# Altium PCB PCB2.PcbDoc
Units mm, origin at the board's own origin, x right, y up, seen from the top; angles counter-clockwise.
Board outline 40.13 x 50.55 mm, 2 copper layers (Top Layer, Bottom Layer); 19 components, 20 nets, 50 pads, 0 vias.
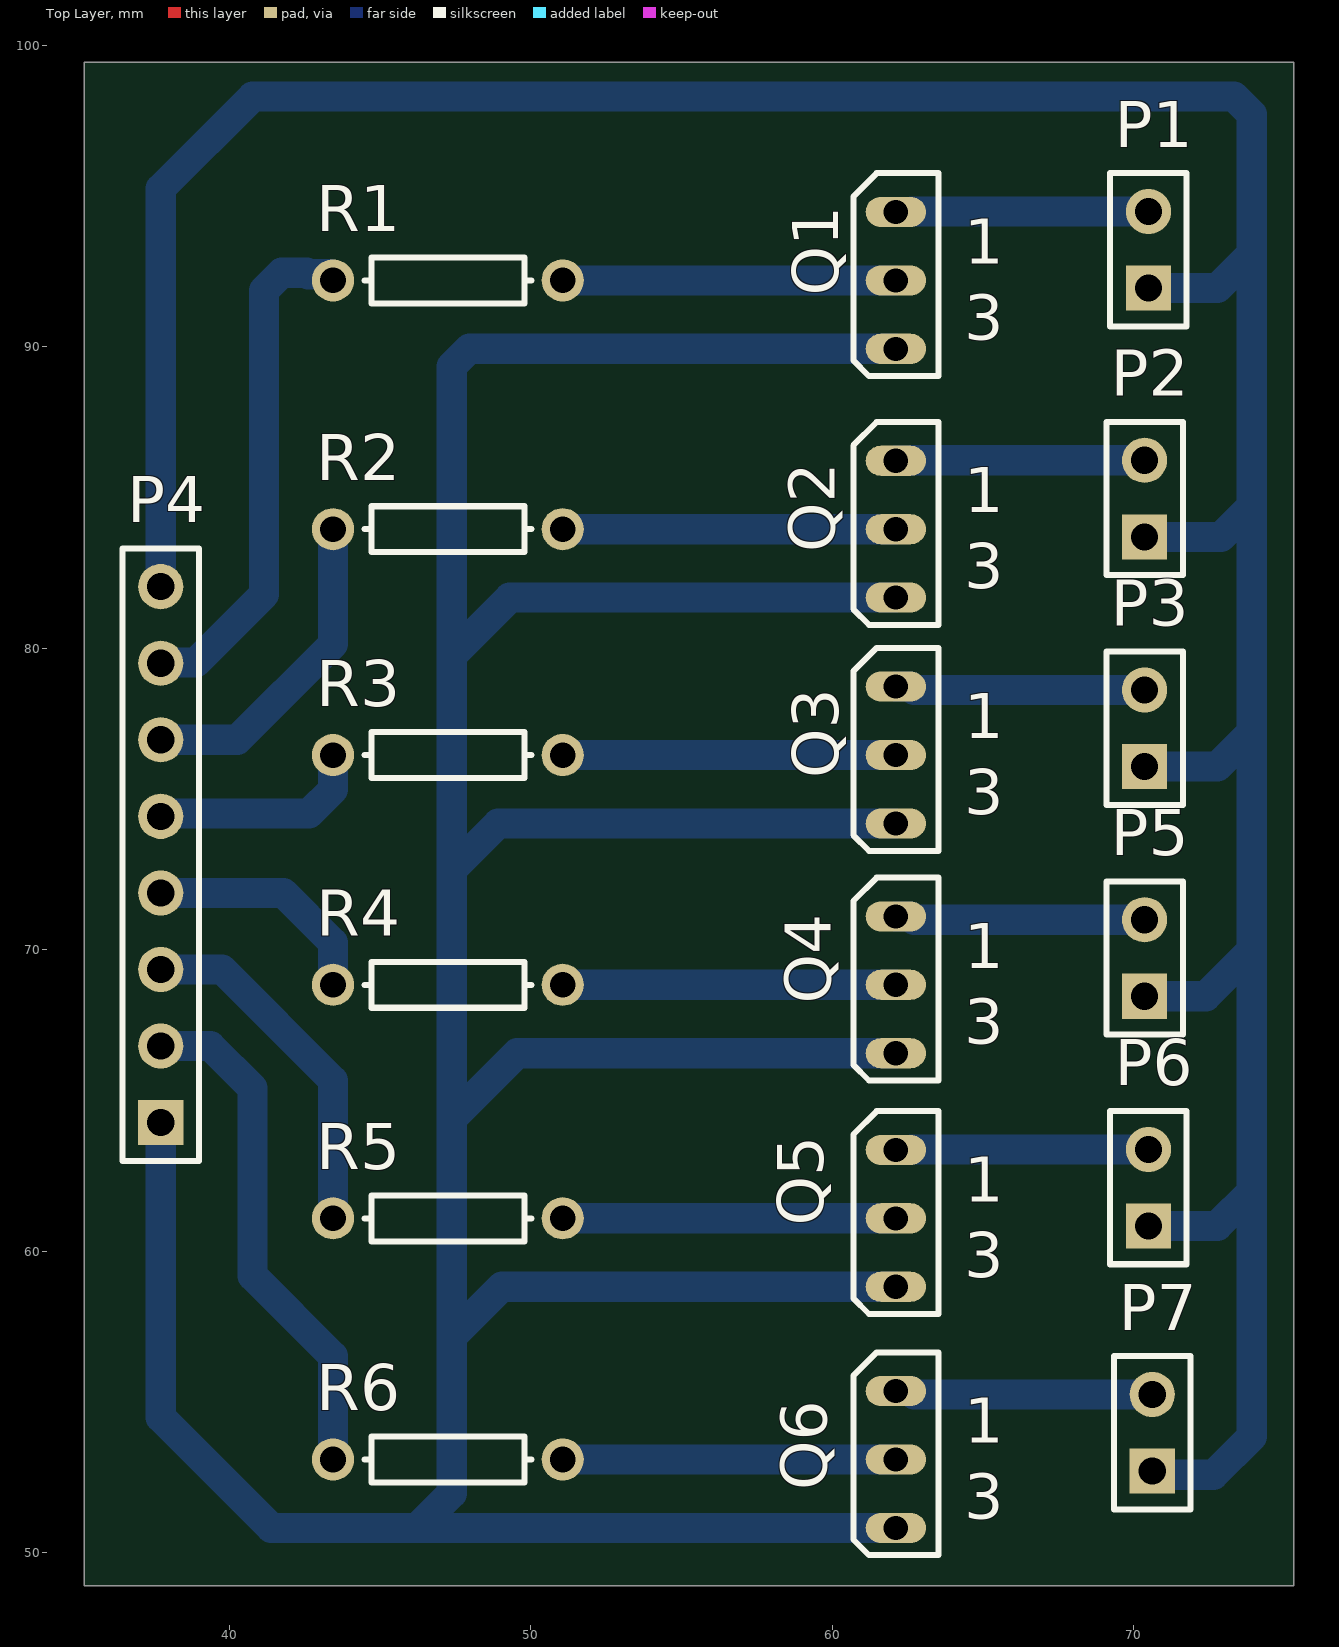
[diagram p0: Top Layer view]
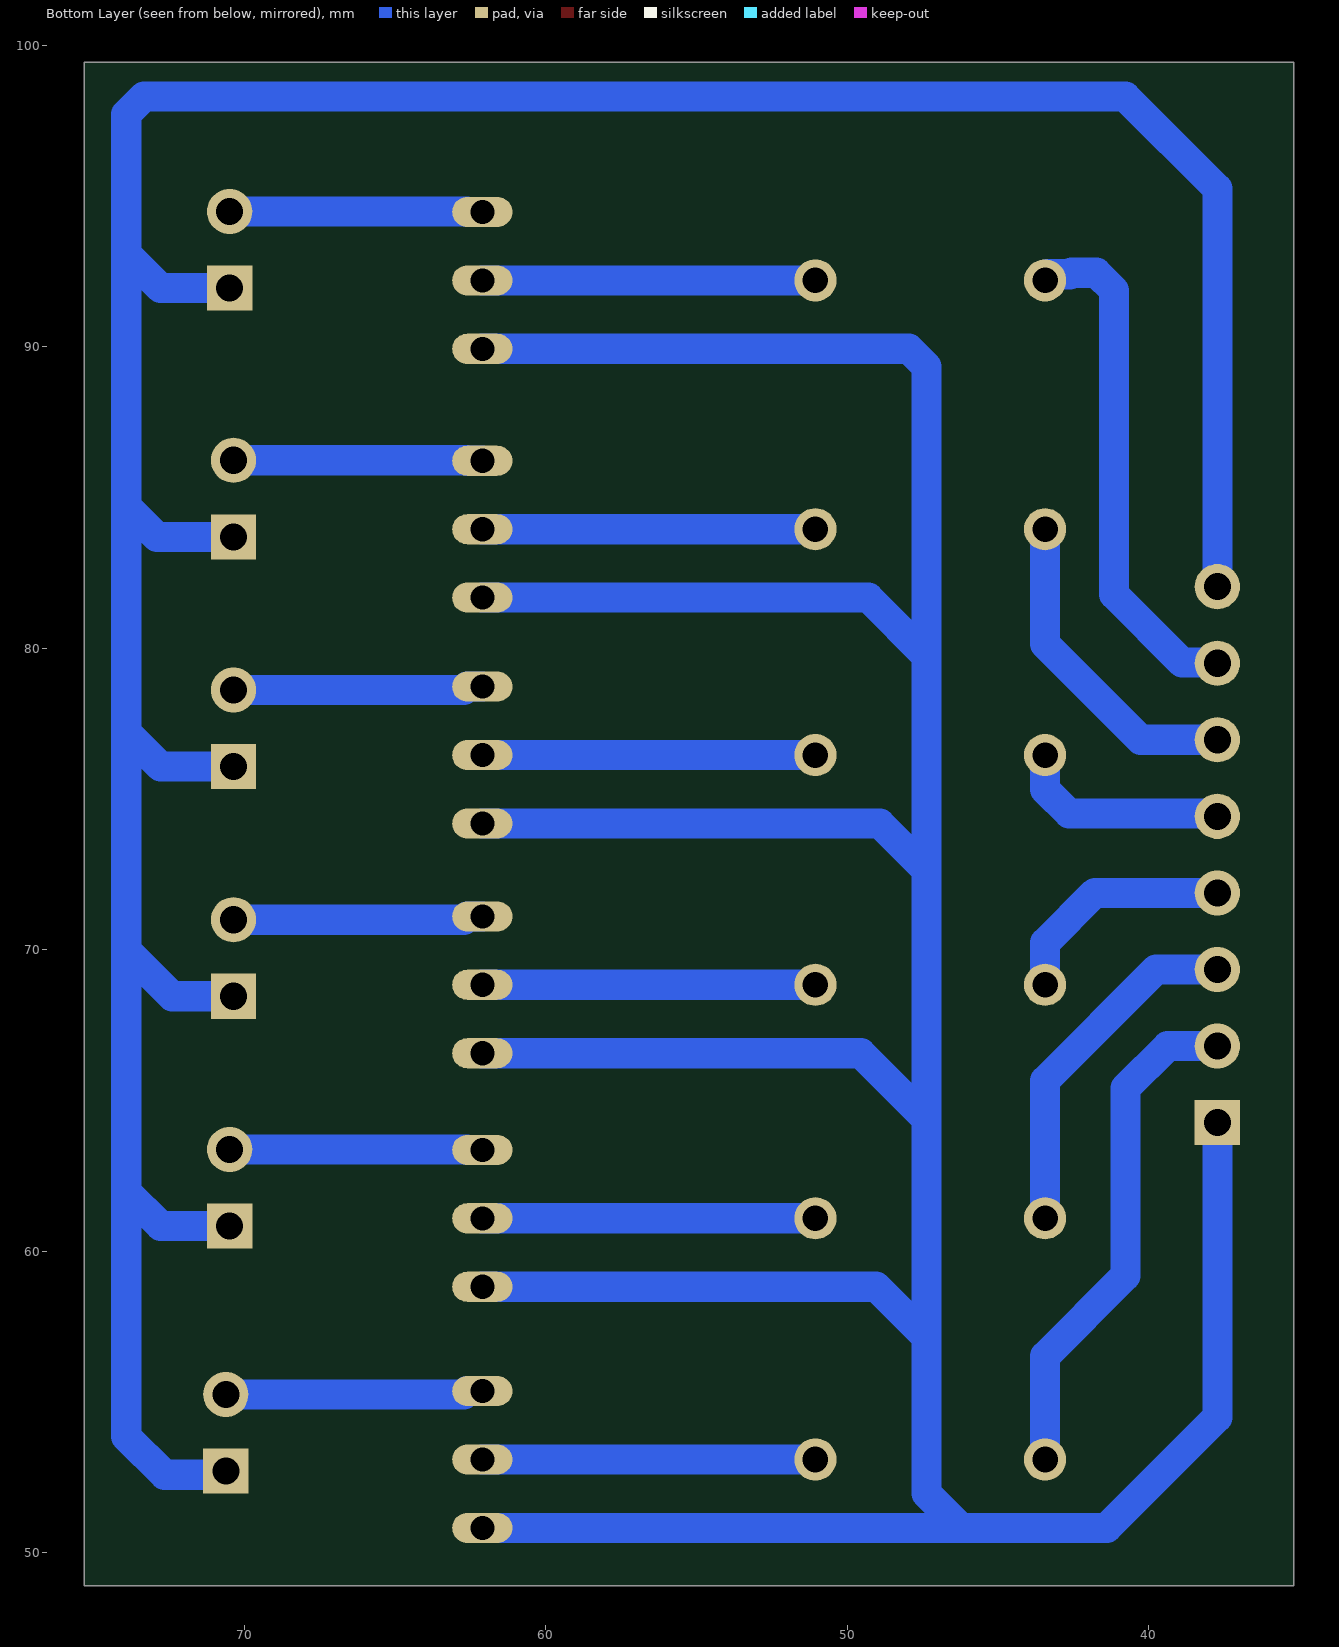
[diagram p1: Bottom Layer view, seen from below]

## Layer stack, top to bottom
Top Solder: solder mask 0.0102, Solder Resist, Dk 3.5
Top Layer: signal copper 0.0356
Dielectric 1: dielectric 0.32, FR-4, Dk 4.8
Bottom Layer: signal copper 0.0356
Bottom Solder: solder mask 0.0102, Solder Resist, Dk 3.5

## Board outline
35.179,48.895 35.179,99.441 75.311,99.441 75.311,48.895

## Design rules (kind name [scope] priority, off if disabled: settings)
Clearance [All] p1: gap=0.254 ignorepadtopadclearanceinfootprint=FALSE except(0: Arc-Hole Track-Hole SMDPad-Hole THPad-Hole Via-Hole Fill-Hole Poly-Hole Region-Hole Text-Hole)
PolygonConnect [All] p1: connectstyle=Relief reliefconductorwidth=0.254 reliefentries=4 polygonreliefangle="90 Angle" airgapwidth=0.254
RoutingVias [All] p1: holewidth=0.711 width=1.27 viastyle="Through Hole" minholewidth=0.711 minwidth=1.27 maxholewidth=0.711 maxwidth=1.27
SolderMaskExpansion [All] p1: expansion=0.102 istentingtop=FALSE
Width [All] p1: maxlimit=1.2 minlimit=1 preferedwidth=1
30 further rules are at their usual default settings.

## Classes and differential pairs
component class Sheet: P1 P2 P3 P4 P5 P6 P7 Q1 R1 R2 R3 R5 R6

## Components (designator, comment, footprint, x,y, rotation, side; value= is the part's Value field where it differs from the comment)
P1 "Header 2" HDR1X2 70.485,91.948 r90 top
P2 "Header 2" HDR1X2 70.358,83.693 r90 top
P3 "Header 2" HDR1X2 70.358,76.073 r90 top
P4 "Header 8" HDR1X8 37.719,64.262 r90 top
P5 "Header 2" HDR1X2 70.358,68.453 r90 top
P6 "Header 2" HDR1X2 70.485,60.833 r90 top
P7 "Header 2" HDR1X2 70.612,52.705 r90 top
Q1 "MOSFET-N" E3 62.103,92.202 r0 top
Q2 "MOSFET-N" E3 62.103,83.947 r0 top
Q3 "MOSFET-N" E3 62.103,76.454 r0 top
Q4 "MOSFET-N" E3 62.103,68.834 r0 top
Q5 "MOSFET-N" E3 62.103,61.087 r0 top
Q6 "MOSFET-N" E3 62.103,53.086 r0 top
R1 "Res1" AXIAL-0.3 47.244,92.202 r0 top value=1K
R2 "Res1" AXIAL-0.3 47.244,83.947 r0 top value=1K
R3 "Res1" AXIAL-0.3 47.244,76.454 r0 top value=1K
R4 "Res1" AXIAL-0.3 47.244,68.834 r0 top value=1K
R5 "Res1" AXIAL-0.3 47.244,61.087 r0 top value=1K
R6 "Res1" AXIAL-0.3 47.244,53.086 r0 top value=1K

## Footprints (in the part's own frame and the unit in brackets; to place one, negate y for a bottom-side part, rotate by r counter-clockwise, add the part's x,y. Pads: shape width x height; smd on the part's side, far side on the other; paste and mask are expansions set on the pad)
AXIAL-0.3 [mm] "Axial Device, Thru-Hole; 2 Leads; 0.3 in Pin Spacing"
  round 1.4 hole 0.85: 1(-3.81,0) 2(3.81,0)
  silkscreen extent -2.77,-0.76 2.77,0.76
E3 [mm] "TO, Flat Index; 3 In-Line, Axial Leads; Body Dia. 4.6mm; Lead Dia. 0.5 mm (max)"
  oval 2x1 hole 0.8: 1(0,2.27) 2(0,0) 3(0,-2.27)
  silkscreen extent -1.41,-3.17 1.41,3.56
HDR1X2 [mm] "Connector; Header; 2 Position"
  rect 1.5x1.5 hole 0.9: 1(0,0)
  round 1.5 hole 0.9: 2(2.54,0)
  silkscreen extent -1.27,-1.27 3.81,1.27
HDR1X8 [mm] "Connector; Header; 8 Position"
  rect 1.5x1.5 hole 0.9: 1(0,0)
  round 1.5 hole 0.9: 2(2.54,0) 3(5.08,0) 4(7.62,0) 5(10.16,0) 6(12.7,0) 7(15.24,0) 8(17.78,0)
  silkscreen extent -1.27,-1.27 19.05,1.27

## Part data
P1 P2 P3 P5 P6 P7: "Header, 2-Pin", LatestRevisionDate=17-Jul-2002, LatestRevisionNote="Re-released for DXP Platform.", Publisher="Altium Limited"
P4: "Header, 8-Pin", LatestRevisionDate=17-Jul-2002, LatestRevisionNote="Re-released for DXP Platform.", Publisher="Altium Limited"
Q1 Q2 Q3 Q4 Q5 Q6: "N-Channel MOSFET", LatestRevisionDate=17-Jul-2002, LatestRevisionNote="Re-released for DXP Platform.", PackageDescription="TO, Flat Index; 3 In-Line, Axial Leads; Body Dia. 4.6mm; Lead Dia. 0.5 mm (max)", PackageReference=E3, PackageVersion=1995/1996, Published=8-Jun-2000, Publisher="Altium Limited"
R1 R2 R3 R4 R5 R6: "Resistor", LatestRevisionDate=17-Jul-2002, LatestRevisionNote="Re-released for DXP Platform.", PackageDescription="Axial Device, Thru-Hole; 2 Leads; 0.3 in Pin Spacing", PackageReference=AXIAL-0.3, Published=8-Jun-2000, Publisher="Altium Limited"

## Nets (pads, with @x,y where several pads share a name; then routed paths per layer and width w, separated by ;. In a path a pad name is that pad's centre, name@x,y a point inside that pad or via, vN(x,y) a via of type N, cw(c..) or ccw(c..) an arc to the next point about the centre after c; other vN are vias at no path point)
1: P4.7 R1.1 | length 17
  Bottom Layer w1: P4.7 37.738,79.521 38.881,79.521 41.148,81.788 41.148,91.87 41.734,92.456 42.562,92.456 42.613,92.406 43.357,92.406 R1.1@43.434,92.329
2: P4.6 R2.1 | length 10.7
  Bottom Layer w1: P4.6 40.259,76.962 43.434,80.137 R2.1@43.434,83.82
3: P4.5 R3.1 | length 7.2
  Bottom Layer w1: P4.5 37.815,74.518 42.641,74.518 43.434,75.311 R3.1
4: P4.4 R4.1 | length 7.7
  Bottom Layer w1: P4.4 41.783,71.882 43.434,70.231 R4.1@43.434,68.961
5: P4.3 R5.1 | length 11.8
  Bottom Layer w1: P4.3 39.751,69.342 43.434,65.659 R5.1
6: P4.2 R6.1 | length 17.1
  Bottom Layer w1: P4.2 39.37,66.802 40.767,65.405 40.767,59.182 43.434,56.515 R6.1
+12: P1.1 P2.1 P3.1 P4.8 P5.1 P6.1 P7.1 | length 118.7
  Bottom Layer w1: P4.8 37.719,95.25 40.767,98.298 73.328,98.298 73.914,97.712 73.914,93.091 ; P5.1 72.39,68.453 73.914,69.977 ; P3.1 72.771,76.073 73.914,77.216 ; P2.1 72.898,83.693 73.914,84.709 ; P6.1 72.771,60.833 73.914,61.976 ; P1.1 72.771,91.948 73.914,93.091 ; P7.1 70.739,52.578 72.644,52.578 73.914,53.848 73.914,61.976 ; 73.914,61.976 73.914,69.977 ; 73.914,69.977 73.914,77.216 ; 73.914,77.216 73.914,84.709 ; 73.914,84.709 73.914,93.091
GND: P4.1 Q1.3 Q2.3 Q3.3 Q4.3 Q5.3 Q6.3 | length 151.6
  Bottom Layer w1: P4.1 37.719,54.483 41.386,50.816 46.228,50.816 ; Q6.3 46.228,50.816 ; Q5.3 49.038,58.817 47.371,57.15 ; Q4.3 49.546,66.564 47.371,64.389 ; Q3.3 48.911,74.184 47.371,72.644 ; Q2.3 49.292,81.677 47.371,79.756 ; Q1.3 47.957,89.932 47.371,89.346 47.371,79.756 ; 46.228,50.816 47.371,51.959 47.371,57.15 ; 47.371,57.15 47.371,64.389 ; 47.371,64.389 47.371,72.644 ; 47.371,72.644 47.371,79.756
NetP1_2: P1.2 Q1.1 | length 8.4
  Bottom Layer w1: Q1.1 62.603,94.472 62.619,94.488 P1.2
NetP2_2: P2.2 Q2.1 | length 8.3
  Bottom Layer w1: Q2.1 62.603,86.217 62.619,86.233 P2.2
NetP3_2: P3.2 Q3.1 | length 8.4
  Bottom Layer w1: Q3.1 62.603,78.724 62.714,78.613 P3.2 P3.2@70.294,78.676
NetP5_2: P5.2 Q4.1 | length 8.3
  Bottom Layer w1: Q4.1 62.603,71.104 62.714,70.993 P5.2
NetP6_2: P6.2 Q5.1 | length 8.4
  Bottom Layer w1: Q5.1 62.603,63.357 62.619,63.373 P6.2
NetP7_2: P7.2 Q6.1 | length 8.6
  Bottom Layer w1: Q6.1 62.603,55.356 62.714,55.245 P7.2
NetQ1_2: Q1.2 R1.2 | length 11
  Bottom Layer w1: R1.2 Q1.2
NetQ2_2: Q2.2 R2.2 | length 11
  Bottom Layer w1: R2.2 Q2.2
NetQ3_2: Q3.2 R3.2 | length 11
  Bottom Layer w1: R3.2 Q3.2
NetQ4_2: Q4.2 R4.2 | length 11
  Bottom Layer w1: R4.2 Q4.2
NetQ5_2: Q5.2 R5.2 | length 11
  Bottom Layer w1: R5.2 Q5.2
NetQ6_2: Q6.2 R6.2 | length 11
  Bottom Layer w1: R6.2 Q6.2

## Silkscreen, mask and mechanical layers (free items; w line width, h text height)
Mechanical 1:
  the board outline again, w0.254

## Text inside footprints (layer, text, board x,y; h text height)
Q1: Top Overlay "1" at 64.378,92.757 h1.5; Top Overlay "3" at 64.378,90.239 h1.5
Q2: Top Overlay "1" at 64.378,84.502 h1.5; Top Overlay "3" at 64.378,81.984 h1.5
Q3: Top Overlay "1" at 64.378,77.009 h1.5; Top Overlay "3" at 64.378,74.491 h1.5
Q4: Top Overlay "1" at 64.378,69.389 h1.5; Top Overlay "3" at 64.378,66.871 h1.5
Q5: Top Overlay "1" at 64.378,61.642 h1.5; Top Overlay "3" at 64.378,59.124 h1.5
Q6: Top Overlay "1" at 64.378,53.641 h1.5; Top Overlay "3" at 64.378,51.123 h1.5